# Altium PCB PCB1.PcbDoc
Units mil, origin at the board's own origin, x right, y up, seen from the top; angles counter-clockwise.
Board outline 2559.06 x 1968.5 mil, 4 copper layers (Top Layer, GND, VDD3V3, Bottom Layer), stack 30.635 mil thick; 115 components, 143 nets, 635 pads, 8 vias.
Unrouted connection lines stored in the file: 372.
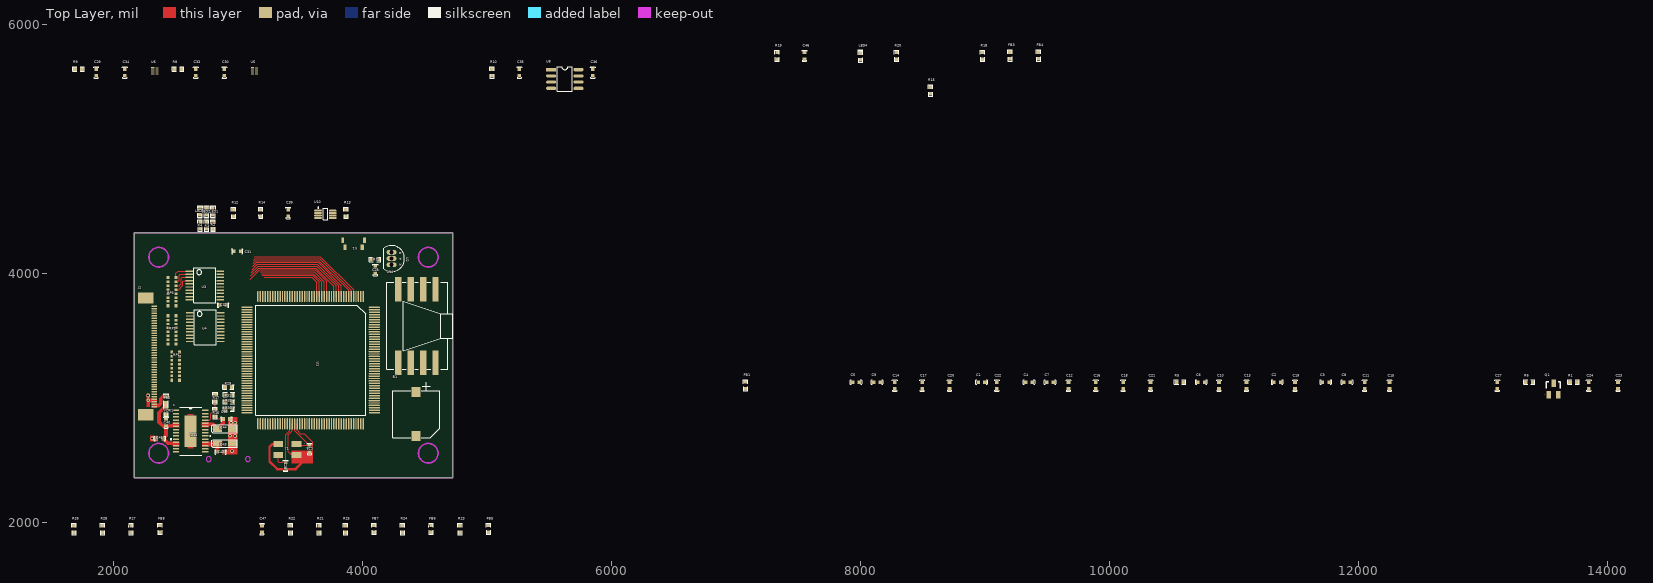
[diagram p0: Top Layer view]
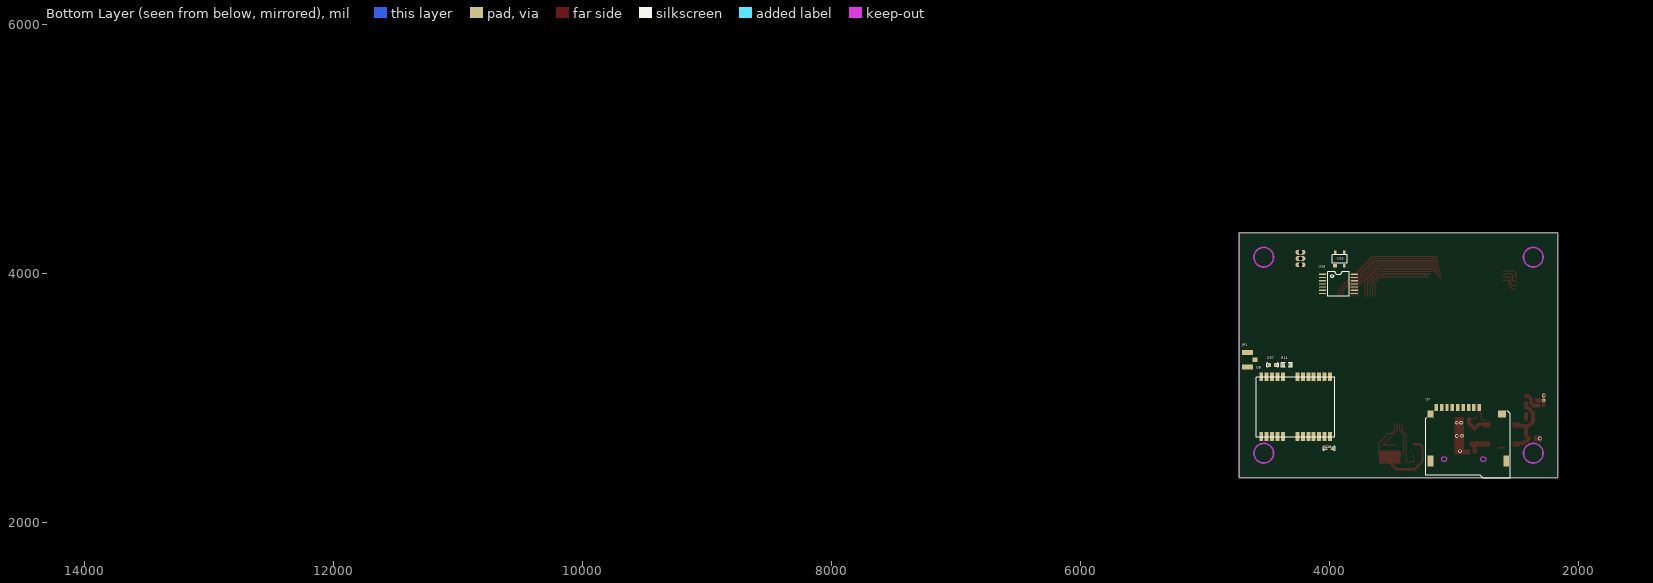
[diagram p1: Bottom Layer view, seen from below]
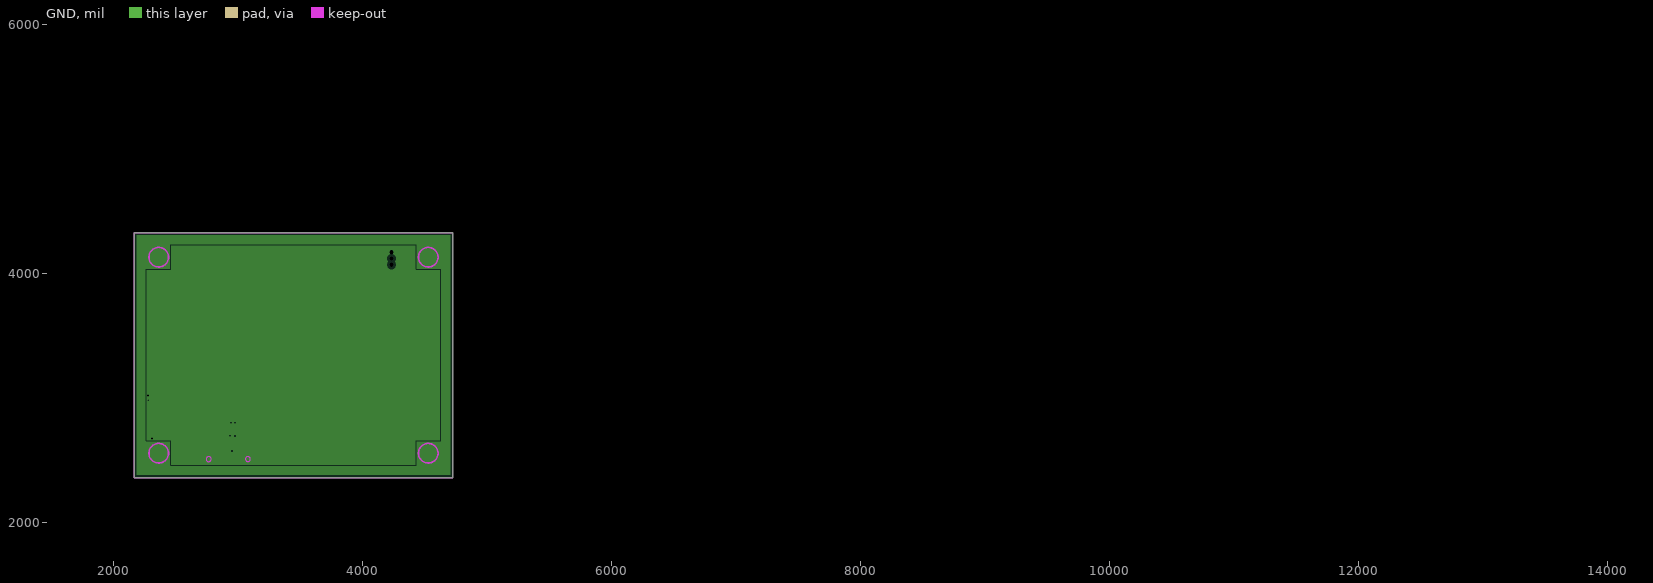
[diagram p2: GND, clearances drawn from the general rule]
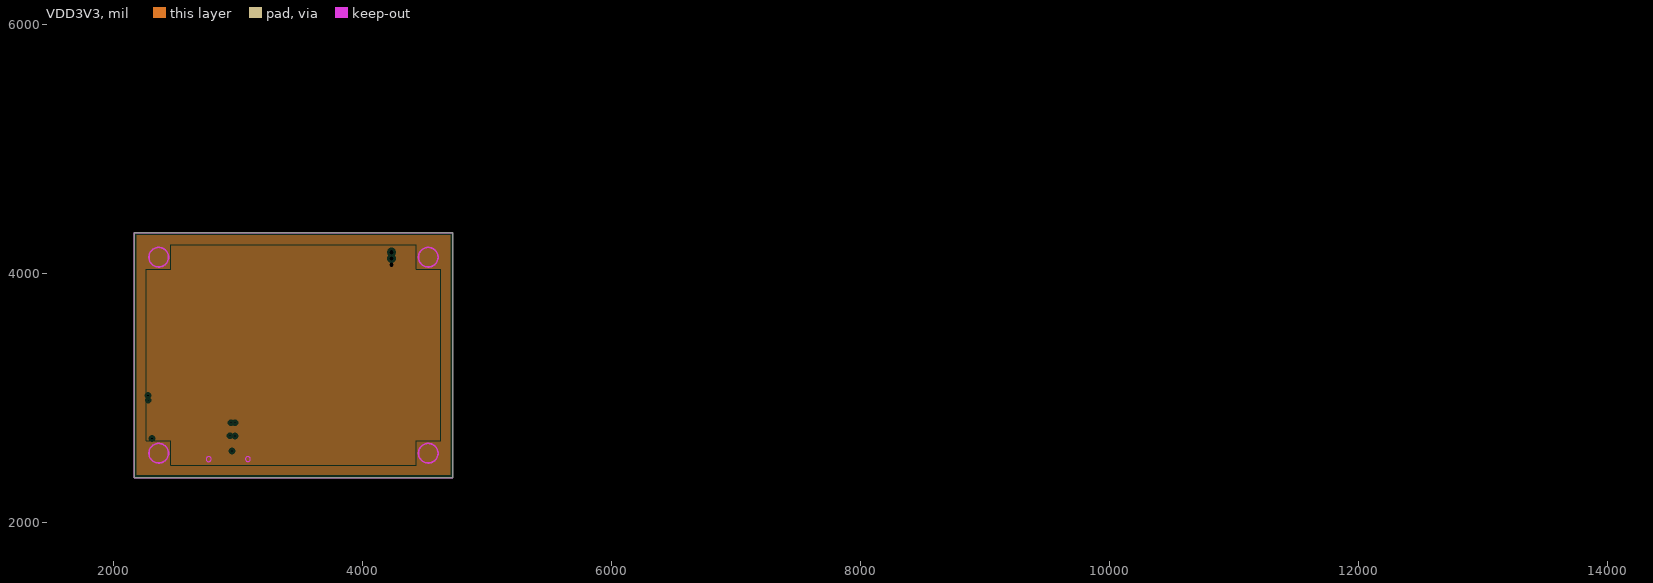
[diagram p3: VDD3V3, clearances drawn from the general rule]

## Layer stack, top to bottom
Top Solder: solder mask 0.4, Solder Resist, Dk 3.5
Top Layer: signal copper 1.4
Dielectric 1: core 10, FR-4, Dk 4.2
GND: plane copper 1.4173
Dielectric 3: prepreg 5, Dk 4.2
VDD3V3: plane copper 1.4173
Dielectric 2: core 10, Dk 4.2
Bottom Layer: signal copper 1.4
Bottom Solder: solder mask 0.4, Solder Resist, Dk 3.5

## Board outline
2165.35,2362.2 2165.35,4330.71 4724.41,4330.71 4724.41,2362.2

## Design rules (kind name [scope] priority, off if disabled: settings)
Clearance [All] p1: gap=5
HoleToHoleClearance [All] p1: gap=0 allowstackedmicrovias=TRUE
MinimumSolderMaskSliver [All] p1: minsoldermaskwidth=0
PlaneClearance [All] p1: clearance=20
PlaneConnect [All] p1: planeconnectstyle=Relief reliefexpansion=20 reliefentries=4 reliefconductorwidth=20 reliefairgap=10
PolygonConnect [All] p1: connectstyle=Relief reliefconductorwidth=10 reliefentries=4 polygonreliefangle="90 Angle" airgapwidth=10
RoomDefinition SBUS [InComponentClass('SBUS')] p1: confinementstyle=ConfineIn formatcopy=TRUE lockcomponents=FALSE outline 2931.73,4422.87 4021.73,4422.87 4021.73,4647.87 2931.73,4647.87
RoutingVias [All] p1: holewidth=28 width=50 viastyle="Through Hole" minholewidth=28 minwidth=50 maxholewidth=28 maxwidth=50
SilkToSilkClearance [All] p1: silktosilkclearance=0
SilkToSolderMaskClearance [IsPad] p1: minsilkscreentomaskgap=0 clearancetoexposedcopper=TRUE
SolderMaskExpansion [All] p1: expansion=4
UnpouredPolygon [All] p1: allowunpoured=FALSE
Width [All] p1: maxlimit=30 minlimit=5 preferedwidth=10
23 further rules are at their usual default settings.

## Classes and differential pairs
component class SBUS: C39 R12 R13 R14 U10
component class PWM&CAN&SD: C29 C30 C31 C32 C33 C34 C35 C36 R8 R9 R10 RP2 RP3 U3 U4 U5 U6 U7 U8
component class POWER: C40 C41 C42 C43 C44 C45 C46 FB2 FB3 FB4 K1 LED4 R15 R16 R17 R18 R19 R20 U11 U12 U13 VDR1
component class IO: J1 R29 R30 R31 R32
component class GPS: C37 C38 JP1 R11 U9
component class F28335: B1 C1 C2 C3 C4 C5 C6 C7 C8 C9 C10 C11 C12 C13 C14 C15 C16 C17 C18 C19 C20 C21 C22 C23 C24 C25 C26 C27 C28 FB1 LED1 LED2 LED3 Q1 R1 R2 R3 R4 R5 R6 R7 RP1 U1 U2 Y1
component class AD: C47 FB5 FB6 FB7 FB8 R21 R22 R23 R24 R25 R26 R27 R28 U14

## Components (designator, comment, footprint, x,y, rotation, side; value= is the part's Value field where it differs from the comment)
B1 "BUZZER" SMD-Beep(9.6*9.6) 4429.13,3051.18 r0 top
C1 "0.1uF" 0603C 8945,3130 r0 top
C2 "0.1uF" 0603C 11320,3130 r0 top
C3 "0.1uF" 0603C 11710,3130 r0 top
C4 "0.1uF" 0603C 9325,3130 r0 top
C5 "0.1uF" 0603C 7935,3130 r0 top
C6 "0.1uF" 0603C 10710,3130 r0 top
C7 "0.1uF" 0603C 9495,3130 r0 top
C8 "0.1uF" 0603C 11880,3130 r0 top
C9 "0.1uF" 0603C 8105,3130 r0 top
C10 "0.1uF" 0603C 10880,3075 r90 top
C11 "0.1uF" 0603C 12050,3075 r90 top
C12 "0.1uF" 0603C 9670,3075 r90 top
C13 "0.1uF" 0603C 11100,3075 r90 top
C14 "0.1uF" 0603C 8275,3075 r90 top
C15 "0.1uF" 0603C 12250,3075 r90 top
C16 "0.1uF" 0603C 9890,3075 r90 top
C17 "0.1uF" 0603C 8495,3075 r90 top
C18 "0.1uF" 0603C 10110,3075 r90 top
C19 "0.1uF" 0603C 11490,3075 r90 top
C20 "0.1uF" 0603C 8715,3075 r90 top
C21 "0.1uF" 0603C 10330,3075 r90 top
C22 "0.1uF" 0603C 9095,3075 r90 top
C23 "2.2uF" 0603C 14085,3075 r90 top
C24 "2.2uF" 0603C 13850,3075 r90 top
C25 "24pF" 0603C 3573,2622 r270 top
C26 "24pF" 0603C 3382,2431 r90 top
C27 "0.1uF" 0603C 13115,3075 r90 top
C28 "0.1uF" 0603C 4102,4005 r90 top
C29 "0.1uF" 0603C 1859.37,5590.55 r90 top
C30 "0.1uF" 0603C 2889.37,5590.55 r90 top
C31 "0.1uF" 0603C 3020,4182 r180 top
C32 "0.1uF" 0603C 2907,3749 r180 top
C33 "0.1uF" 0603C 2659.37,5590.55 r90 top
C34 "0.1uF" 0603C 2089.37,5590.55 r90 top
C35 "0.1uF" 0603C 5259.37,5590.55 r90 top
C36 "0.1uF" 0603C 5849.37,5590.55 r90 top
C37 "0.1uF" 0603C 4429.13,3267.72 r0 bottom
C38 "0.1uF" 0603C 3976.38,2598.43 r0 bottom
C39 "0.1uF" 0603C 3401.73,4462.87 r90 top
C40 "0.1uF" 0603C 2421.26,2834.65 r270 top
C41 "10uF" 0603C 2342.52,2677.17 r0 top
C42 "0.1uF" 0603C 2886,2570 r180 top
C43 "10uF/6.3V" 3216/A 2834.65,2637.8 r180 top
C44 "10uF/6.3V" 3216/A 2834.65,2755.91 r180 top
C45 "0.1uF" 0603C 2933.07,2834.65 r180 top
C46 "0.1uF" 0603C 7550,5725 r90 top
C47 "0.1uF" 0603C 3191.3,1922.8 r90 top
FB1 "742792625" 0603-FB 7075,3105 r90 top
FB2 "742792625" 0603-FB 2421.26,2992.13 r270 top
FB3 "742792625" 0603-FB 9200,5755 r90 top
FB4 "742792625" 0603-FB 9430,5755 r90 top
FB5 "742792625" 0603-FB 5011.3,1952.8 r90 top
FB6 "742792625" 0603-FB 4551.3,1952.8 r90 top
FB7 "742792625" 0603-FB 4091.3,1952.8 r90 top
FB8 "742792625" 0603-FB 2371.3,1952.8 r90 top
J1 "HEAD1X42/4-1734592-2" FPC0.5-42 2325,3741 r270 top
JP1 "ANTINA(NC)" IPEX-20279-00E-03 4566.93,3208.66 r180 bottom
K1 "RESET_Key" KEY(2*4*3.5) 3996.06,4212.6 r180 top
LED1 "RED" 0603D 2797,4529 r270 top
LED2 "GRREN" 0603D 2746,4529 r270 top
LED3 "BLUE" 0603D 2694,4529 r270 top
LED4 "RED" 0603D 8000,5720 r90 top
Q1 "8550" SOT23-PNP 13530,3030 r0 top
R1 "24.9K/1%" 0603R 13700,3130 r0 top
R2 "1K" 0603R 2798,4361 r90 top
R3 "500" 0603R 2747,4362 r90 top
R4 "1K" 0603R 2695,4362 r90 top
R5 "10K" 0603R 10540,3130 r0 top
R6 "1K" 0603R 13345,3130 r0 top
R7 "10K" 0603R 4072,4117 r0 top
R8 "10K" 0603R 2489.37,5645.55 r0 top
R9 "10K" 0603R 1689.37,5645.55 r0 top
R10 "120" 0603R 5039.37,5590.55 r90 top
R11 "10K" 0603R 4370.08,3267.72 r180 bottom
R12 "10K" 0603R 2961.73,4462.87 r90 top
R13 "220" 0603R 3866.73,4462.87 r90 top
R14 "220" 0603R 3181.73,4462.87 r90 top
R15 "10K" 0603R 8561,5446 r90 top
R16 "18.2K/1%" 0603R 2814.96,2854.33 r90 top
R17 "30.1K/1%" 0603R 2814.96,3031.5 r270 top
R18 "10K" 0603R 8980,5725 r90 top
R19 "10K" 0603R 7330,5725 r90 top
R20 "10K" 0603R 8290,5725 r90 top
R21 "2K/0.1%" 0603R 3651.3,1922.8 r90 top
R22 "1K/0.1%" 0603R 3421.3,1922.8 r90 top
R23 "10K/0.1%" 0603R 4781.3,1922.8 r90 top
R24 "10K/0.1%" 0603R 4321.3,1922.8 r90 top
R25 "10K/0.1%" 0603R 3861.3,1922.8 r90 top
R26 "1K/0.1%" 0603R 1681.3,1922.8 r90 top
R27 "667/0.1%" 0603R 2141.3,1922.8 r90 top
R28 "10K/0.1%" 0603R 1911.3,1922.8 r90 top
R29 "10K" 0603R 2893.7,3090.55 r0 top
R30 "10K" 0603R 2897.76,2913.39 r0 top
R31 "10K" 0603R 2897.76,3031.5 r0 top
R32 "10K" 0603R 2897.76,2972.44 r0 top
RP1 "YC248/220" YC248 2498,3259 r270 top
RP2 "YC248/220" YC248 2468,3550 r270 top
RP3 "YC248/220" YC248 2469,3857 r270 top
U1 "TMS320F28335" LQFP-176 3582.68,3307.09 r270 top
U2 "DS18B20" TO-92 4232.28,4173.23 r90 top
U3 "74HC245" TSSOP20 2608,4022.41 r270 top
U4 "74HC245" TSSOP20 2612,3687 r270 top
U5 "NLSX4373" UDFN8 3114.37,5655.55 r0 top
U6 "NLSX4373" UDFN8 2314.37,5655.55 r0 top
U7 "MICROSD_SPI" microsd 3188.98,2874.02 r180 bottom
U8 "MC33901" SOIC-8 5624.37,5565.55 r0 top
U9 "ubox-M8N" ublox-M8 4271.65,2933.07 r90 bottom
U10 "74LVC2G240" VSSOP8-0.5 3641.73,4507.87 r0 top
U11 "TPS767D301" TPS767D301 2618.11,2736.22 r0 top
U12 "IMP811" IMP811 3917.32,4114.17 r180 bottom
U13 "74HC08D" TSSOP14 4055.12,3996.06 r270 bottom
U14 "MPXV7002DP" MPXV7002DP 4586.61,3877.95 r270 top
VDR1 "82536040" 0603R 2421.26,2874.02 r90 top
Y1 "30M" 5032Y 3395,2589 r180 top

## Footprints (in the part's own frame and the unit in brackets; to place one, negate y for a bottom-side part, rotate by r counter-clockwise, add the part's x,y. Pads: shape width x height; smd on the part's side, far side on the other; paste and mask are expansions set on the pad)
0603-FB [mil]
  rect 30x30 smd: 1(-27.5,0) 2(27.5,0)
  silkscreen extent -46,-18 46,18
0603C [mil]
  rect 30x30 smd: 1(0,0) 2(55,0)
  silkscreen extent -19,-18 73,19
0603D [mil]
  rect 30x30 smd: 1(0,0) 2(55,0)
  silkscreen extent -18,-18 79,18
0603R [mil]
  rect 30x30 smd: 1(0,0) 2(55,0)
  silkscreen extent -18,-18 73,18
3216/A [mm]
  rect 1.78x1.27 smd: 1(0,0) 2(-3.05,0)
  silkscreen extent -4.05,-0.8 1.25,0.8
5032Y [mm]
  rect 2x1.2 smd: 1(-1.85,-1.1) 2(1.85,-1.1) 3(1.85,1.1) 4(-1.85,1.1)
  silkscreen extent -3.61,-1.22 -3.56,-1.18
FPC0.5-42 [mm]
  rect 2.3x3.1 smd: 0(-1.67,-1.7) 0(22.17,-1.7)
  rect 0.3x1.1 smd: 1(0,0) 2(0.5,0) 3(1,0) 4(1.5,0) 5(2,0) 6(2.5,0) 7(3,0) 8(3.5,0) 9(4,0) 10(4.5,0) 11(5,0) 12(5.5,0) 13(6,0) 14(6.5,0) 15(7,0) 16(7.5,0) 17(8,0) 18(8.5,0) 19(9,0) 20(9.5,0) 21(10,0) 22(10.5,0) 23(11,0) 24(11.5,0) 25(12,0) 26(12.5,0) 27(13,0) 28(13.5,0) 29(14,0) 30(14.5,0) 31(15,0) 32(15.5,0) 33(16,0) 34(16.5,0) 35(17,0) 36(17.5,0) 37(18,0) 38(18.5,0) 39(19,0) 40(19.5,0) 41(20,0) 42(20.5,0)
IMP811 [mm]
  rect 0.8x0.8 smd: 1(-0.923,-1.25)
  rect 0.5x0.8 smd: 2(0.952,-1.25) 3(0.952,1.475) 4(-0.948,1.475)
  silkscreen extent -1.55,-0.77 1.53,1
IPEX-20279-00E-03 [mm]
  rect 2.2x1.05 smd: 1(-2.3,1.1) 1(-2.3,4.05)
  rect 1.05x1 smd: 2(-0.775,2.575)
KEY(2*4*3.5) [mm]
  rect 0.6x1.2 smd: 0(-0.45,-1.45) 0(3.95,-1.45)
  rect 0.7x1.1 smd: 1(0,0) 2(3.5,0)
LQFP-176 [mm]
  rect 2.3x0.3 smd: 1(-13,10.75)
  oval 2.3x0.3 smd: 2(-13,10.25) 3(-13,9.75) 4(-13,9.25) 5(-13,8.75) 6(-13,8.25) 7(-13,7.75) 8(-13,7.25) 9(-13,6.75) 10(-13,6.25) 11(-13,5.75) 12(-13,5.25) 13(-13,4.75) 14(-13,4.25) 15(-13,3.75) 16(-13,3.25) 17(-13,2.75) 18(-13,2.25) 19(-13,1.75) 20(-13,1.25) 21(-13,0.75) 22(-13,0.25) 23(-13,-0.25) 24(-13,-0.75) 25(-13,-1.25) 26(-13,-1.75) 27(-13,-2.25) 28(-13,-2.75) 29(-13,-3.25) 30(-13,-3.75) 31(-13,-4.25) 32(-13,-4.75) 33(-13,-5.25) 34(-13,-5.75) 35(-13,-6.25) 36(-13,-6.75) 37(-13,-7.25) 38(-13,-7.75) 39(-13,-8.25) 40(-13,-8.75) 41(-13,-9.25) 42(-13,-9.75) 43(-13,-10.25) 44(-13,-10.75) 89(13,-10.75) 90(13,-10.25) 91(13,-9.75) 92(13,-9.25) 93(13,-8.75) 94(13,-8.25) 95(13,-7.75) 96(13,-7.25) 97(13,-6.75) 98(13,-6.25) 99(13,-5.75) 100(13,-5.25) 101(13,-4.75) 102(13,-4.25) 103(13,-3.75) 104(13,-3.25) 105(13,-2.75) 106(13,-2.25) 107(13,-1.75) 108(13,-1.25) 109(13,-0.75) 110(13,-0.25) 111(13,0.25) 112(13,0.75) 113(13,1.25) 114(13,1.75) 115(13,2.25) 116(13,2.75) 117(13,3.25) 118(13,3.75) 119(13,4.25) 120(13,4.75) 121(13,5.25) 122(13,5.75) 123(13,6.25) 124(13,6.75) 125(13,7.25) 126(13,7.75) 127(13,8.25) 128(13,8.75) 129(13,9.25) 130(13,9.75) 131(13,10.25) 132(13,10.75)
  oval 0.3x2.3 smd: 45(-10.75,-13) 46(-10.25,-13) 47(-9.75,-13) 48(-9.25,-13) 49(-8.75,-13) 50(-8.25,-13) 51(-7.75,-13) 52(-7.25,-13) 53(-6.75,-13) 54(-6.25,-13) 55(-5.75,-13) 56(-5.25,-13) 57(-4.75,-13) 58(-4.25,-13) 59(-3.75,-13) 60(-3.25,-13) 61(-2.75,-13) 62(-2.25,-13) 63(-1.75,-13) 64(-1.25,-13) 65(-0.75,-13) 66(-0.25,-13) 67(0.25,-13) 68(0.75,-13) 69(1.25,-13) 70(1.75,-13) 71(2.25,-13) 72(2.75,-13) 73(3.25,-13) 74(3.75,-13) 75(4.25,-13) 76(4.75,-13) 77(5.25,-13) 78(5.75,-13) 79(6.25,-13) 80(6.75,-13) 81(7.25,-13) 82(7.75,-13) 83(8.25,-13) 84(8.75,-13) 85(9.25,-13) 86(9.75,-13) 87(10.25,-13) 88(10.75,-13) 133(10.75,13) 134(10.25,13) 135(9.75,13) 136(9.25,13) 137(8.75,13) 138(8.25,13) 139(7.75,13) 140(7.25,13) 141(6.75,13) 142(6.25,13) 143(5.75,13) 144(5.25,13) 145(4.75,13) 146(4.25,13) 147(3.75,13) 148(3.25,13) 149(2.75,13) 150(2.25,13) 151(1.75,13) 152(1.25,13) 153(0.75,13) 154(0.25,13) 155(-0.25,13) 156(-0.75,13) 157(-1.25,13) 158(-1.75,13) 159(-2.25,13) 160(-2.75,13) 161(-3.25,13) 162(-3.75,13) 163(-4.25,13) 164(-4.75,13) 165(-5.25,13) 166(-5.75,13) 167(-6.25,13) 168(-6.75,13) 169(-7.25,13) 170(-7.75,13) 171(-8.25,13) 172(-8.75,13) 173(-9.25,13) 174(-9.75,13) 175(-10.25,13) 176(-10.75,13)
  silkscreen extent -11.21,-11.21 11.21,11.21
microsd [mm]
  rect 0.7x1.4 smd: 1(10,1.3) 2(8.9,1.3) 3(7.8,1.3) 4(6.7,1.3) 5(5.6,1.3) 6(4.5,1.3) 7(3.4,1.3) 8(2.3,1.3) 9(1.2,1.3)
  rect 1.2x1.4 smd: 10(0,0)
  rect 1.2x2.2 smd: 10(0,-9.6) 10(15.5,-9.6)
  rect 1.6x1.4 smd: 10(14.6,0)
  Keep-Out Layer circle w0.05: c2.8,-9.2 r0.5
  Keep-Out Layer circle w0.05: c10.8,-9.2 r0.51
  silkscreen extent -0.9,-13.1 16.3,0.7
MPXV7002DP [mm]
  rect 5x1.27 smd: 1(0,0) 2(0,-2.54) 3(0,-5.08) 4(0,-7.62) 5(15,-7.62) 6(15,-5.08) 7(15,-2.54) 8(15,0)
  silkscreen extent -1.39,-9.97 16.39,3.54
SMD-Beep(9.6*9.6) [mm]
  rect 1.9x2.1 smd: 1(0,0) 2(0,-9)
  silkscreen extent -4.8,-9.3 4.8,2
SOIC-8 [mm]
  rect 2.03x0.66 smd: 1(-2.795,1.905)
  oval 2.03x0.66 smd: 2(-2.795,0.635) 3(-2.795,-0.635) 4(-2.795,-1.905) 5(2.795,-1.905) 6(2.795,-0.635) 7(2.795,0.635) 8(2.795,1.905)
  silkscreen extent -1.5,-2.54 1.5,2.54
SOT23-PNP [mil]
  rect 36x60 smd: 1(0,0) 2(75,0) 3(38,90)
  silkscreen extent -34,-2 93,105
TO-92 [mm]
  oval 1x2 hole 0.9: 1(0,0) 2(-1.27,0) 3(-2.54,0)
  silkscreen extent -3.92,-2.65 1.38,1.55
TPS767D301 [mil]
  rect 50x12 smd: 1(-117,166.34) 2(-117,140.75) 3(-117,115.16) 4(-117,89.57) 5(-117,63.98) 6(-117,38.39) 7(-117,12.8) 8(-117,-12.8) 9(-117,-38.39) 10(-117,-63.98) 11(-117,-89.57) 12(-117,-115.16) 13(-117,-140.75) 14(-117,-166.34) 15(117,-166.34) 16(117,-140.75) 17(117,-115.16) 18(117,-89.57) 19(117,-63.98) 20(117,-38.39) 21(117,-12.8) 22(117,12.8) 23(117,38.39) 24(117,63.98) 25(117,89.57) 26(117,115.16) 27(117,140.75) 28(117,166.34)
  rect 94.49x254.33 smd: 29(0,0)
  Top Layer region: 22.64,-127.17 -22.64,-127.17 -22.64,-137.01 22.64,-137.01
  Top Layer region: 22.64,127.17 -22.64,127.17 -22.64,137.01 22.64,137.01
  silkscreen extent -162,-193 162,193, body extent -130,-193 130,193, height 67
TSSOP14 [mm]
  oval 0.25x1.5 smd: 1(0.001,0.001) 2(0.651,0.001) 3(1.301,0.001) 4(1.951,0.001) 5(2.601,0.001) 6(3.251,0.001) 7(3.901,0.001) 8(3.901,6.501) 9(3.251,6.501) 10(2.601,6.501) 11(1.951,6.501) 12(1.301,6.501) 13(0.651,6.501) 14(0.001,6.501)
  silkscreen extent -0.55,1.05 4.45,5.45
TSSOP20 [mm]
  rect 0.3x1.5 smd: 1(0,0) 2(0.65,0) 3(1.3,0) 4(1.95,0) 5(2.6,0) 6(3.25,0) 7(3.9,0) 8(4.55,0) 9(5.2,0) 10(5.85,0) 11(5.85,6.3) 12(5.2,6.3) 13(4.55,6.3) 14(3.9,6.3) 15(3.25,6.3) 16(2.6,6.3) 17(1.95,6.3) 18(1.3,6.3) 19(0.65,6.3) 20(0,6.3)
  silkscreen extent -0.68,0.9 6.5,5.4
ublox-M8 [mm]
  rect 1.8x0.8 smd: 1(6.1,-7) 2(6.1,-5.9) 3(6.1,-4.8) 4(6.1,-3.7) 5(6.1,-2.6) 6(6.1,-1.5) 7(6.1,-0.4) 8(6.1,2.6) 9(6.1,3.7) 10(6.1,4.8) 11(6.1,5.9) 12(6.1,7) 13(-6.1,7) 14(-6.1,5.9) 15(-6.1,4.8) 16(-6.1,3.7) 17(-6.1,2.6) 18(-6.1,-0.4) 19(-6.1,-1.5) 20(-6.1,-2.6) 21(-6.1,-3.7) 22(-6.1,-4.8) 23(-6.1,-5.9) 24(-6.1,-7)
  silkscreen extent -6.2,-8 6,8
UDFN8 [mm]
  rect 0.66x0.32 smd: 1(0,0)
  rect 0.66x0.22 smd: 2(0,-0.45) 3(0,-0.85) 4(0,-1.25) 5(0.84,-1.25) 6(0.84,-0.85) 7(0.84,-0.45) 8(0.84,-0.05)
VSSOP8-0.5 [mm]
  oval 1.55x0.45 smd: 1(0,0) 2(0,-0.5) 3(0,-1) 4(0,-1.5) 5(3,-1.5) 6(3,-1) 7(3,-0.5) 8(3,0)
  silkscreen extent -0.07,-1.88 1.95,0.75
YC248 [mm]
  rect 0.65x0.6 smd: 1(-2.875,-0.8) 8(2.875,-0.8) 9(2.875,0.8) 16(-2.875,0.8)
  rect 0.5x0.6 smd: 2(-2,-0.8) 3(-1.2,-0.8) 4(-0.4,-0.8) 5(0.4,-0.8) 6(1.2,-0.8) 7(2,-0.8) 10(2,0.8) 11(1.2,0.8) 12(0.4,0.8) 13(-0.4,0.8) 14(-1.2,0.8) 15(-2,0.8)

## Part data
B1: "Buzzer"
C1 C2 C3 C4 C5 C6 C7 C8 C9 C10 C11 C12 C13 C14 C15 C16 C17 C18 C19 C20 C21 C22 C23 C24 C25 C26 C27 C28 C29 C30 C31 C32 C33 C34 C35 C36 C37 C38 C39 C40 C41 C42 C45 C46 C47: library part C
C43 C44: library part C-POLAR
FB1 FB2 FB3 FB4 FB5 FB6 FB7 FB8: library part FB
J1: library part HEAD1X42
JP1: library part ANTINA
LED1 LED2 LED3 LED4: library part LED
Q1: library part PNP, "PNP Transistor"
R1 R2 R3 R4 R5 R6 R7 R8 R9 R10 R11 R12 R13 R14 R15 R16 R17 R18 R19 R20 R21 R22 R23 R24 R25 R26 R27 R28 R29 R30 R31 R32: library part R
RP1 RP2 RP3: library part RP
U13: "2-INPUT AND GATE"
VDR1: library part Varistor
Y1: library part Crystal-4

## Via types
v1: diameter 30, hole 15, Top Layer to Bottom Layer, 8 vias

## Nets (pads, with @x,y where several pads share a name; then routed paths per layer and width w, separated by ;. In a path a pad name is that pad's centre, name@x,y a point inside that pad or via, vN(x,y) a via of type N, cw(c..) or ccw(c..) an arc to the next point about the centre after c; other vN are vias at no path point)
AGND: C23.2 C24.2 FB1.2 R1.1 U1.32 U1.33 U1.35 U1.36 U1.37 U1.38 U1.43 U1.44 U1.46 U1.47 U1.48 U1.49 U1.50 U1.51 U1.52 U1.53 U1.58
BAT2S_VOLT: J1.36 R21.1
BAT6S_VOLT_SENSE: FB6.1 J1.35
BAT_CURRENT_SENSE: FB5.1 J1.34
BATT2S_VOLT_SENSE: R25.1 U1.40
BATT6S_VOLT_SENSE: R24.1 U1.42
BATT_CURRENT_SENSE: R23.1 U1.41
CANRXB: U1.24 U8.4
CANSTB: U1.63 U8.8
CANTH: J1.37 R10.1 U8.7
CANTL: J1.38 R10.2 U8.6
CANTXB: U1.21 U8.1
CAP1: J1.32 U5.2
CAP2: J1.33 U5.3
DSP_RST: R5.1 R11.2 U1.80 U9.8 U13.11
ECAP5: U1.88 U5.7
ECAP6: U1.89 U5.6
EMU0: J1.29 R31.2 U1.85
EMU1: J1.30 R32.2 U1.86
EPWM1A: U1.5 U3.18 | length 960.5
  Top Layer w10: 3129.11,4136.82 3129.29,4137 3661.35,4137 3927.16,3871.18 U1.5
EPWM1B: U1.6 U3.17 | length 942.5
  Top Layer w10: 3124.74,4111.23 3135.51,4122 3655.13,4122 3907.48,3869.65 U1.6
EPWM2A: U1.7 U3.16 | length 924.5
  Top Layer w10: 3120.36,4085.64 3141.72,4107 3648.92,4107 3887.79,3868.12 U1.7
EPWM2B: U1.10 U3.15 | length 890.1
  Top Layer w10: 3115.98,4060.05 3147.93,4092 3642.71,4092 3828.74,3905.97 U1.10
EPWM3A: U1.11 U3.14 | length 872.1
  Top Layer w10: 3111.6,4034.46 3154.15,4077 3636.49,4077 3809.05,3904.44 U1.11
EPWM3B: U1.12 U3.13 | length 854.1
  Top Layer w10: 3107.23,4008.87 3160.36,4062 3630.28,4062 3789.37,3902.91 U1.12
EPWM4A: U1.13 U3.12 | length 836
  Top Layer w10: 3102.85,3983.28 3166.57,4047 3624.07,4047 3769.68,3901.38 U1.13
EPWM4B: U1.16 U3.11 | length 801.7
  Top Layer w10: 3098.47,3957.68 3172.79,4032 3617.85,4032 3710.63,3939.22 U1.16
EPWM5A: U1.17 U4.18 | length 663.6
  Top Layer w10: 3179,4017 3611.64,4017 3690.94,3937.69 U1.17
EPWM5B: U1.18 U4.17 | length 630.6
  Top Layer w10: 3185.21,4002 3605.43,4002 3671.26,3936.17 U1.18
EPWM6A: U1.19 U4.16 | length 595
  Top Layer w10: 3194,3987 3599.21,3987 3651.57,3934.64 U1.19
EPWM6B: U1.20 U4.15 | length 554.2
  Top Layer w10: 3208,3972 3593,3972 3631.89,3933.11 U1.20
GND: B1.2 C1.2 C2.2 C3.2 C4.2 C5.2 C6.2 C7.2 C8.2 C9.2 C10.2 C11.2 C12.2 C13.2 C14.2 C15.2 C16.2 C17.2 C18.2 C19.2 C20.2 C21.2 C22.2 C25.2 C26.1 C27.1 C28.1 C29.1 C30.1 C31.1 C32.1 C33.1 C34.1 C35.1 C36.1 C37.2 C38.1 C39.2 C40.1 C41.1 C42.1 C43.2 C44.2 C45.1 C46.1 C47.1 FB1.1 J1.39 J1.40 JP1.1 K1.1 LED4.2 R12.2 R17.1 R22.2 R26.1 R29.1 U1.3 U1.8 U1.14 U1.22 U1.30 U1.60 U1.70 U1.83 U1.92 U1.103 U1.105 U1.106 U1.108 U1.118 U1.120 U1.125 U1.140 U1.144 U1.147 U1.155 U1.160 U1.166 U1.171 U2.1 U3.1 U3.10 U3.19 U4.1 U4.10 U4.19 U5.4 U6.4 U7.6 U7.10 U8.2 U9.2 U9.7 U9.10 U9.12 U9.13 U9.24 U10.1 U10.4 U10.7 U11.3 U11.4 U11.9 U11.10 U11.29 U12.1 U13.1 U13.2 U13.4 U13.5 U13.7 U14.3 VDR1.1 Y1.2 Y1.4 | length 1234.3
  Top Layer w10: U1.103 3435.04,2740.04 3401,2706 3401,2571 3426.31,2545.69 Y1.4 ; U1.105 3474.41,2741.8 3500.21,2716 3532,2716 3600,2648 3600,2535 3581,2516
  Top Layer w20: Y1.2 3276.31,2632.31 3252,2608 3252,2493 3314,2431 C26.1 3462,2431 3526,2495
  Top Layer w30: C40.1 VDR1.1
  other v1: 2950,2576 2309,2677 2976,2697 2935,2699 2942,2804 2976,2804 2278,2985 2277,3023
GPS_C\S\: U1.99 U9.18
GPS_MISO: U1.97 U9.20
GPS_MOSI: U1.96 U9.21
GPS_SLK: U1.98 U9.19
I\S\E\N\S\O\R\_\C\S\: J1.22 RP1.8
ISENSOR_CLK: J1.21 RP1.7
ISENSOR_SIMO: J1.19 RP1.5
ISENSOR_SOMI: J1.20 RP1.6
NetB1_1: B1.1 Q1.3
NetC23_1: C23.1 U1.56
NetC24_1: C24.1 U1.55
NetC25_1: C25.1 U1.104 Y1.1 | length 331.7
  Top Layer w10: U1.104 3454.72,2740.28 C25.1 3478.14,2622 Y1.1
NetC26_2: C26.2 U1.102 Y1.3 | length 439.8
  Top Layer w10: Y1.3 3322.17,2490.83 3327,2486 C26.2 3382,2708.21 3415.35,2741.57 U1.102
NetC27_2: C27.2 Q1.1 R6.2
NetFB5_2: FB5.2 R23.2
NetFB6_2: FB6.2 R24.2
NetFB7_1: FB7.1 R21.2 R22.1
NetFB7_2: FB7.2 R25.2
NetFB8_1: FB8.1 R26.2 R27.1
NetFB8_2: FB8.2 R28.2
NetK1_2: K1.2 R19.1 U12.3
NetLED1_2: LED1.2 R2.2
NetLED2_2: LED2.2 R3.2
NetLED3_2: LED3.2 R4.2
NetLED4_1: LED4.1 R18.1
NetR1_2: R1.2 U1.57
NetR2_1: R2.1 U1.172
NetR3_1: R3.1 U1.173
NetR4_1: R4.1 U1.174
NetR6_1: R6.1 U1.132
NetR8_1: R8.1 U5.5
NetR9_1: R9.1 U6.5
NetR12_1: R12.1 R14.2 U10.3
NetR13_2: R13.2 U10.2
NetR16_2: R16.2 R17.2 U11.25 | length 202.9
  Top Layer w10: U11.25 2767.79,2825.79 2780,2838 2780,2874.37 R16.2 R17.2
NetR20_1: R20.1 U13.10
NetR27_2: R27.2 U14.4
NetRP1_9: RP1.9 U1.73
NetRP1_10: RP1.10 U1.72
NetRP1_11: RP1.11 U1.69
NetRP1_12: RP1.12 U1.68
NetRP1_13: RP1.13 U1.67
NetRP1_14: RP1.14 U1.66
NetRP1_15: RP1.15 U1.65
NetRP1_16: RP1.16 U1.64
NetRP2_10: RP2.10 U4.8
NetRP2_12: RP2.12 U4.6
NetRP2_13: RP2.13 U4.5
NetRP2_14: RP2.14 U4.4
NetRP2_15: RP2.15 U4.3
NetRP2_16: RP2.16 U4.2
NetRP3_9: RP3.9 U3.9
NetRP3_10: RP3.10 U3.8
NetRP3_11: RP3.11 U3.7
NetRP3_12: RP3.12 U3.6
NetRP3_13: RP3.13 U3.5 | length 156.4
  Top Layer w10: RP3.13 2522.75,3872.75 2557,3907 2557,3939 2563.64,3945.64 2608,3945.64
NetRP3_14: RP3.14 U3.4 | length 162.2
  Top Layer w10: RP3.14 2526.24,3904.24 2542,3920 2542,3966 2547.23,3971.23 2608,3971.23
NetRP3_15: RP3.15 U3.3 | length 156.6
  Top Layer w10: RP3.15 2513.74,3935.74 2525,3947 2525,3987.64 2534.18,3996.82 2608,3996.82
NetRP3_16: RP3.16 U3.2 | length 149.2
  Top Layer w10: RP3.16 2500.5,4004.5 2518.41,4022.41 2608,4022.41
NetU12_2: U12.2 U13.13
NetU13_8: U13.8 U13.12
POWER_RESET: R15.1 U11.22 U11.28 U13.9
PWM1: J1.1 RP3.1
PWM2: J1.2 RP3.2
PWM3: J1.3 RP3.3
PWM4: J1.4 RP3.4
PWM5: J1.5 RP3.5
PWM6: J1.6 RP3.6
PWM7: J1.7 RP3.7
PWM8: J1.8 RP3.8
PWM9: J1.9 RP2.1
PWM10: J1.10 RP2.2
PWM11: J1.11 RP2.3
PWM12: J1.12 RP2.4
RF_IN: JP1.2 U9.11
SBUS_RX: J1.13 R14.1
SBUS_TX: J1.14 R13.1
SCIRXA: J1.16 RP2.6
SCIRXC: J1.18 RP2.8
SCIRXDA: U1.145 U4.7
SCIRXDA1: RP2.11 U4.13
SCIRXDB: U1.26 U10.6
SCIRXDC: U1.113 U4.9
SCIRXDC1: RP2.9 U4.11
SCITXA: J1.15 RP2.5
SCITXC: J1.17 RP2.7
SCITXDA: U1.148 U4.14
SCITXDB: U1.25 U10.5
SCITXDC: U1.114 U4.12
SCL: J1.24 U6.3
SCLA: U1.75 U6.6
SDA: J1.23 U6.2
SDAA: U1.74 U6.7
SDCARD_CS: RP1.4 U7.2
SDCARD_MISO: RP1.2 U7.7
SDCARD_MOSI: RP1.1 U7.3
SDCARD_SCLK: RP1.3 U7.5
SKY_SPEED_SENSE: R28.1 U1.39
T\R\S\T\: J1.27 R29.2 U1.78
TCK: J1.31 R30.2 U1.87
TDI: J1.25 U1.76
TDO: J1.26 U1.77
TEMP_DQ: R7.2 U1.1 U2.2
TMS: J1.28 U1.79
V5: FB2.1 J1.41 J1.42 | length 152.1
  Top Layer w30: 2322,2943 2363,2943 2378,2958 2378,2994 2403.63,3019.63 FB2.1
VCC3V3: C38.2 FB3.2 FB4.1 U7.4 U9.23
VCC_RF: C37.1 FB4.2 U9.9
VDD1V9: C1.1 C4.1 C5.1 C7.1 C9.1 C12.1 C14.1 C16.1 C17.1 C18.1 C20.1 C21.1 C22.1 C44.1 C45.2 R16.1 U1.4 U1.15 U1.23 U1.29 U1.31 U1.59 U1.61 U1.101 U1.109 U1.117 U1.126 U1.139 U1.146 U1.154 U1.167 U11.23 U11.24 | length 277.2
  Top Layer w10: R16.1 2834.65,2834.65 C45.2
  Top Layer w30: 2740,2791 2799.55,2791 C44.1 2878.07,2799.33 C45.2
VDD3V3: C2.1 C3.1 C6.1 C8.1 C10.1 C11.1 C13.1 C15.1 C19.1 C28.2 C31.2 C32.2 C33.2 C34.2 C35.2 C39.1 C42.2 C43.1 C46.2 FB3.1 LED1.1 LED2.1 LED3.1 Q1.2 R5.2 R7.1 R8.2 R9.2 R11.1 R15.2 R18.2 R19.2 R20.2 R30.1 R31.1 R32.1 U1.9 U1.34 U1.45 U1.71 U1.84 U1.93 U1.107 U1.121 U1.143 U1.159 U1.170 U2.3 U3.20 U4.20 U5.8 U6.8 U8.5 U10.8 U11.17 U11.18 U12.4 U13.14 | length 69.3
  Top Layer w30: C42.2 2834.65,2573.65 C43.1
VDD5: C29.2 C30.2 C36.2 C40.2 C41.2 C47.2 FB2.2 U5.1 U6.1 U8.3 U11.5 U11.6 U11.11 U11.12 U14.2 VDR1.2 | length 564
  Top Layer w30: FB2.2 VDR1.2 2409.02,2929.02 2365,2885 2365,2810 2395.35,2779.65 C40.2 ; 2491,2639 2435.69,2639 C41.2 2421.26,2700.91 C40.2 ; 2505,2791 2493.65,2779.65 C40.2
XCLOUT: U1.138
pads on no net: J1.0 K1.0 U1.2 U1.27 U1.28 U1.54 U1.62 U1.81 U1.82 U1.90 U1.91 U1.94 U1.95 U1.100 U1.110 U1.111 U1.112 U1.115 U1.116 U1.119 U1.122 U1.123 U1.124 U1.127 U1.128 U1.129 U1.130 U1.131 U1.133 U1.134 U1.135 U1.136 U1.137 U1.141 U1.142 U1.149 U1.150 U1.151 U1.152 U1.153 U1.156 U1.157 U1.158 U1.161 U1.162 U1.163 U1.164 U1.165 U1.168 U1.169 U1.175 U1.176 U7.1 U7.8 U7.9 U9.1 U9.3 U9.4 U9.5 U9.6 U9.14 U9.15 U9.16 U9.17 U9.22 U11.1 U11.2 U11.7 U11.8 U11.13 U11.14 U11.15 U11.16 U11.19 U11.20 U11.21 U11.26 U11.27 U13.3 U13.6 U14.1 U14.5 U14.6 U14.7 U14.8

## Polygon pours and split planes (outlines as drawn)
GND on GND (split plane): 4427.13,4035.43 4427.28,4034.66 4427.71,4034.01 4428.37,4033.58 4429.13,4033.43 4623.98,4033.43 4623.98,2659.49 4429.13,2659.49 4428.37,2659.33 4427.71,2658.9 4427.28,2658.25 4427.13,2657.48 4427.13,2462.64 2462.64,2462.64 2462.64,2657.48 2462.48,2658.25 2462.05,2658.9 2461.4,2659.33 2460.63,2659.49 2265.79,2659.49 2265.79,4033.43 2460.63,4033.43 2461.4,4033.58 2462.05,4034.01 2462.48,4034.66 2462.64,4035.43 2462.64,4230.28 4427.13,4230.28
no net on GND (split plane): 4704.31,2382.3 2185.45,2382.3 2185.45,4310.61 4704.31,4310.61
VDD3V3 on VDD3V3 (split plane): 4427.13,4035.43 4427.28,4034.66 4427.71,4034.01 4428.37,4033.58 4429.13,4033.43 4623.98,4033.43 4623.98,2659.49 4429.13,2659.49 4428.37,2659.33 4427.71,2658.9 4427.28,2658.25 4427.13,2657.48 4427.13,2462.64 2462.64,2462.64 2462.64,2657.48 2462.48,2658.25 2462.05,2658.9 2461.4,2659.33 2460.63,2659.49 2265.79,2659.49 2265.79,4033.43 2460.63,4033.43 2461.4,4033.58 2462.05,4034.01 2462.48,4034.66 2462.64,4035.43 2462.64,4230.28 4427.13,4230.28
no net on VDD3V3 (split plane): 4704.31,2382.3 2185.45,2382.3 2185.45,4310.61 4704.31,4310.61

## Keep-outs
Keep-Out Layer:
  circle w13: c4527.56,2559.06 r78.74
  circle w13: c2362.2,2559.06 r78.74
  circle w13: c4527.56,4133.86 r78.74
  circle w13: c2362.2,4133.86 r78.74
  lines w3.94: 2165.35,2362.2 2165.35,4330.71 4724.41,4330.71 4724.41,2362.2 2165.35,2362.2

## Other copper
Top Layer:
  rectangle net GND: 2263,2930 2293,2967
  rectangle net GND: 2263,3000 2293,3040
  rectangle net GND: 2290,2655 2357,2700
  rectangle net GND: 2919,2590 2994,2608
  rectangle net GND: 2870,2547 2994,2590
  rectangle net GND: 2917,2782 2995,2851
  rectangle net GND: 2919,2608 2995,2782
  rectangle net VDD1V9: 2706,2767 2765,2808
  rectangle net VDD3V3: 2708,2614 2873,2655
  rectangle net VDD5: 2474,2767 2529,2806
  rectangle net VDD5: 2471,2614 2529,2654
  rectangle net V5: 2303,2927 2349,2959
  rectangle net GND: 2263,2967 2348,3000
  rectangle net GND: 3427,2477 3600,2583
GND (plane layer: these items are gaps in the copper):
  lines w3.94: 2263.78,2657.48 2460.63,2657.48 2460.63,2460.63 4429.13,2460.63 4429.13,2657.48 4625.98,2657.48 4625.98,4035.43 4429.13,4035.43 4429.13,4232.28 2460.63,4232.28 2460.63,4035.43 2263.78,4035.43 2263.78,2657.48
VDD3V3 (plane layer: these items are gaps in the copper):
  lines w3.94: 2263.78,2657.48 2460.63,2657.48 2460.63,2460.63 4429.13,2460.63 4429.13,2657.48 4625.98,2657.48 4625.98,4035.43 4429.13,4035.43 4429.13,4232.28 2460.63,4232.28 2460.63,4035.43 2263.78,4035.43 2263.78,2657.48

## Silkscreen, mask and mechanical layers (free items; w line width, h text height)
Mechanical 1:
  circle w13: c2362.2,2559.06 r78.74
  circle w13: c2362.2,4133.86 r78.74
  circle w13: c4527.56,4133.86 r78.74
  circle w13: c4527.56,2559.06 r78.74
  lines w3.94: 2165.35,2362.2 4724.41,2362.2 4724.41,4330.71 2165.35,4330.71 2165.35,2362.2

## Text inside footprints (layer, text, board x,y; h text height)
U2: Top Overlay "A" at 4313.04,4109.51 h20 r90; Top Overlay "K" at 4312.4,4063.21 h20 r90; Top Overlay "R" at 4313.04,4159.02 h20 r90
U11: Top Overlay "*" at 2480.32,2933.07 h20; Mechanical 13 "*" at 2480.32,2933.07 h20